# EAGLE board aspduno (EAGLE 9.4.2)
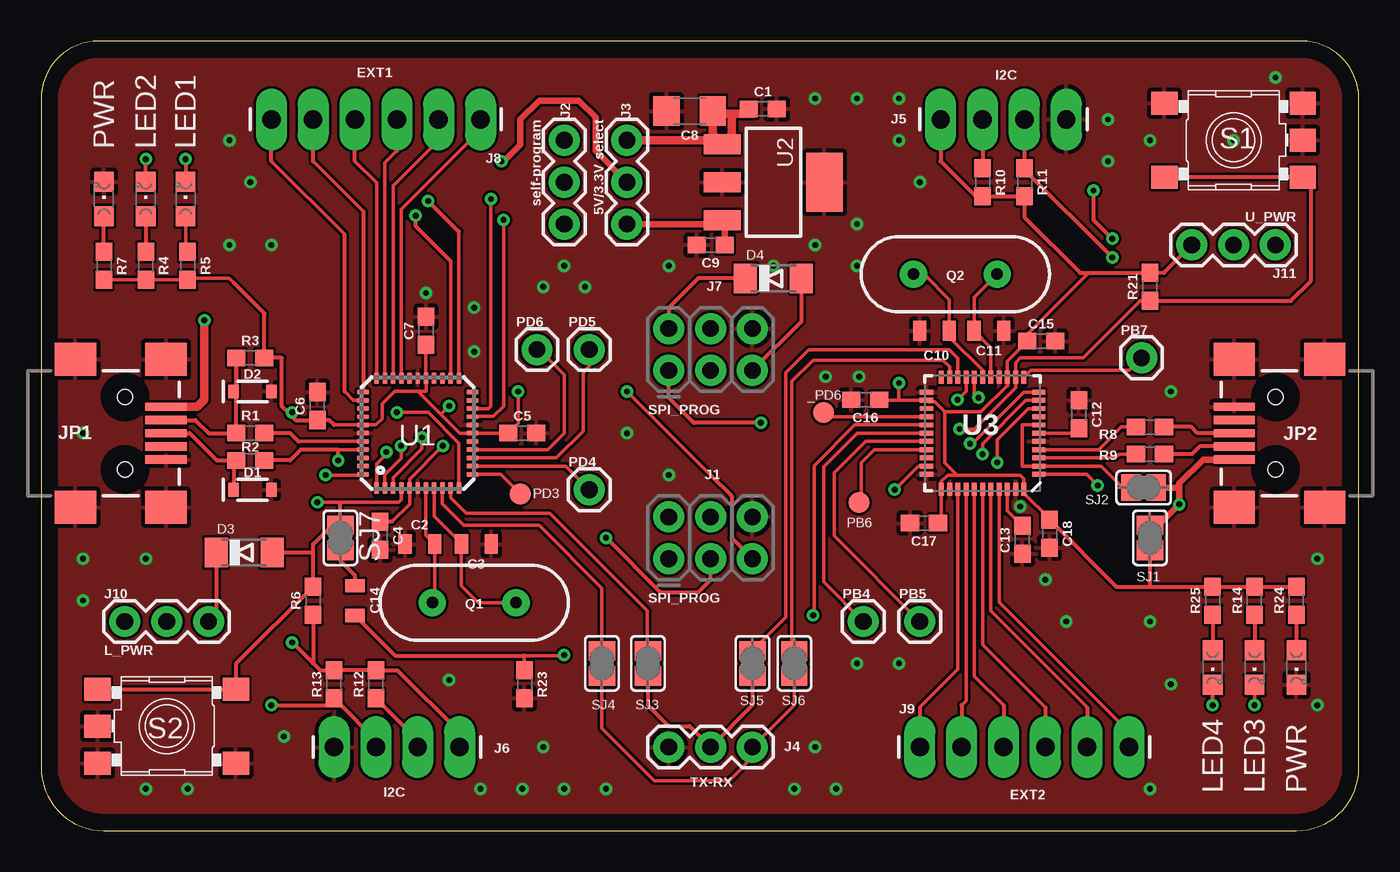
[diagram p0: board, top side]
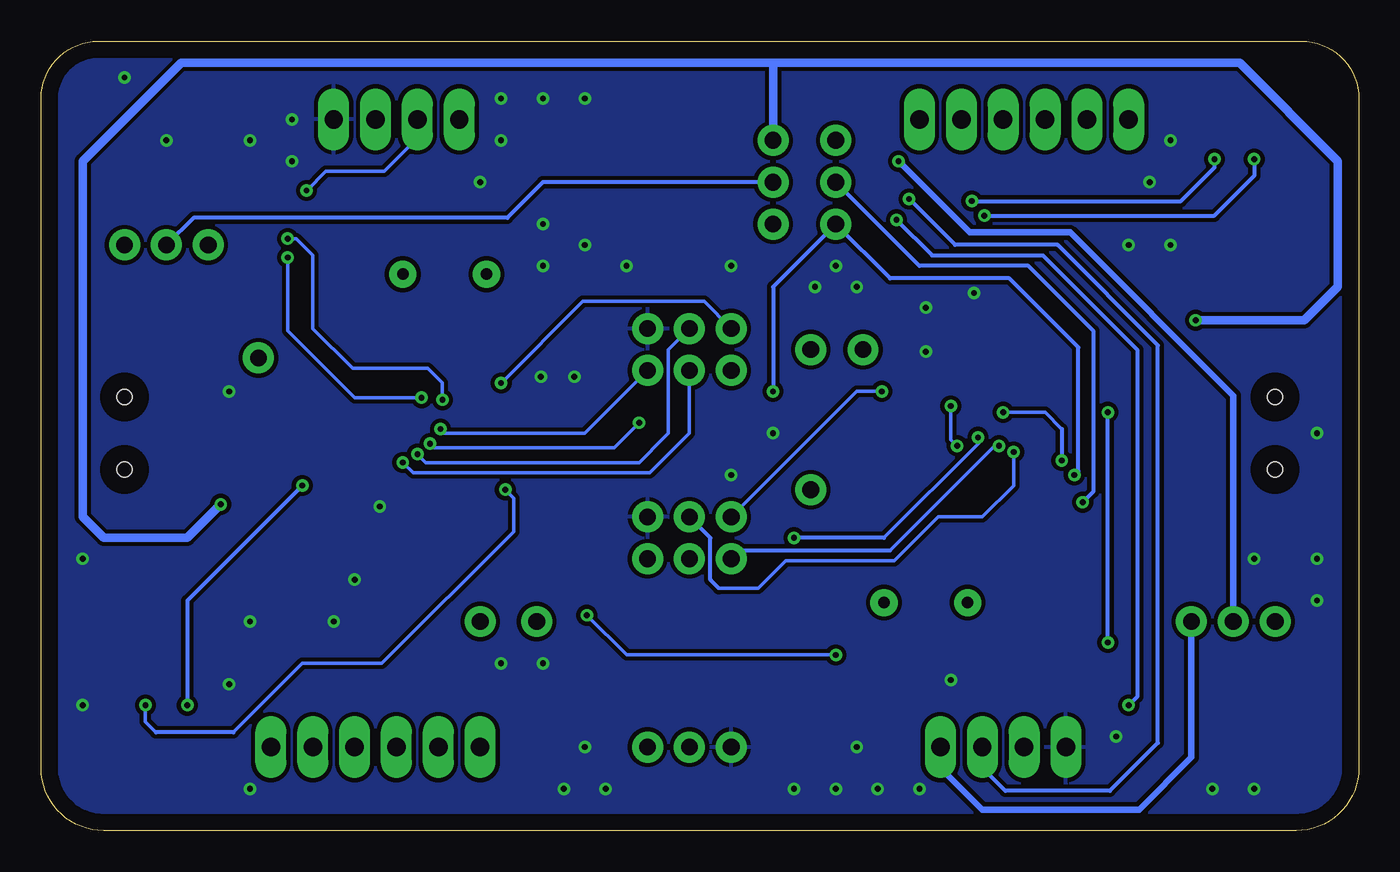
[diagram p1: board, bottom side, seen from below]

Size 79.99 x 47.93 mm. Coordinates in mm from the lower left corner, seen from the top.
Outline: 0,44.45 0,3.81 arc90 3.81,0 76.2,0 arc90 79.99,3.79 79.99,44.47 arc90 76.53,47.93 3.48,47.93 arc90 0,44.45
Copper layers (1*16): Top 0.035mm / dielectric 1.5mm / Bottom 0.035mm
Design rules "default": minimum track width 6mil, minimum drill 0.35mm, track to track 6mil, track to pad 6mil, pad to pad 6mil, via to via 6mil, smd to smd 6mil, copper to edge 40mil, drill to drill 6mil, minimum pad ring 10mil, minimum via ring 8mil, stop-mask expansion 4mil, vias tented up to drill 0mil, thermal gap 10mil

## Footprints (pad centres in the part's own frame; a part is rotated, then mirrored left to right if it is on the bottom)
B1,27 = smd 1.27 x 1.27: TP 0,0
0603 = smd 1.1 x 1: 1 -0.85,0; 2 0.85,0
0805 = smd 0.8 x 1.2: 1 -0.9,0; 2 0.9,0
1206 = smd 1.6 x 1.8: 1 -1.4,0; 2 1.4,0
SOD-323 = smd 0.63 x 0.83: A 1.15,0; C -1.15,0
MINIMELF = smd 1.4 x 1.8: A 1.7,0; C -1.7,0
2X3-NS = drill 1.016 pad 1.88: 1 -2.54,-1.27; 2 -2.54,1.27; 3 0,-1.27; 4 0,1.27; 5 2.54,-1.27; 6 2.54,1.27
1X03 = drill 1.016 pad 1.88: 1 0,0; 2 2.54,0; 3 5.08,0
1X04_LONGPADS = drill 1.118 pad 1.88 long: 1 0,0; 2 2.54,0; 3 5.08,0; 4 7.62,0
1X06_LONGPADS = drill 1.118 pad 1.88 long: 1 0,0; 2 2.54,0; 3 5.08,0; 4 7.62,0; 5 10.16,0; 6 12.7,0
USB-MINIB = smd 2.5 x 0.5: D+ 2.5,0; D- 2.5,0.8; GND 2.5,-1.6; ID 2.5,-0.8; VBUS 2.5,1.6 | smd 2.5 x 2: S1 -3,4.5; S2 2.5,4.5; S3 -3,-4.5; S4 2.5,-4.5 | hole 0.9: 0,2.2; 0,-2.2
CHIPLED_0805 = smd 1.2 x 1.2: A 0,-1.05; C 0,1.05
1X01 = drill 1.016 pad 1.88: 1 0,0
HC49US = drill 0.7 pad 1.651: 1 -2.54,0; 2 2.54,0
SKHMPXE010 = smd 1.6 x 1.4: 1 -4.2,2.25; 2 4.2,2.25; 3 -4.2,-2.25; 4 4.2,-2.25; 5 4.2,0
SJ = smd 1.168 x 1.6: 1 -0.762,0; 2 0.762,0
MLF44 = smd 0.7 x 0.3: 1 -3.325,2.5; 2 -3.325,2; 3 -3.325,1.5; 4 -3.325,1; 5 -3.325,0.5; 6 -3.325,0; 7 -3.325,-0.5; 8 -3.325,-1; 9 -3.325,-1.5; 10 -3.325,-2; 11 -3.325,-2.5; 23 3.325,-2.5; 24 3.325,-2; 25 3.325,-1.5; 26 3.325,-1; 27 3.325,-0.5; 28 3.325,0; 29 3.325,0.5; 30 3.325,1; 31 3.325,1.5; 32 3.325,2; 33 3.325,2.5 | smd 0.3 x 0.7: 12 -2.5,-3.325; 13 -2,-3.325; 14 -1.5,-3.325; 15 -1,-3.325; 16 -0.5,-3.325; 17 0,-3.325; 18 0.5,-3.325; 19 1,-3.325; 20 1.5,-3.325; 21 2,-3.325; 22 2.5,-3.325; 34 2.5,3.325; 35 2,3.325; 36 1.5,3.325; 37 1,3.325; 38 0.5,3.325; 39 0,3.325; 40 -0.5,3.325; 41 -1,3.325; 42 -1.5,3.325; 43 -2,3.325; 44 -2.5,3.325
SOT-223-3 = smd 1.219 x 2.235: 1 -2.311,-3.099; 2 0,-3.099; 3 2.311,-3.099 | smd 3.6 x 2.2: 4 0,3.099
QFN-44-NOPAD = smd 0.8 x 0.3: 1 -3.4,2.5; 2 -3.4,2; 3 -3.4,1.5; 4 -3.4,1; 5 -3.4,0.5; 6 -3.4,0; 7 -3.4,-0.5; 8 -3.4,-1; 9 -3.4,-1.5; 10 -3.4,-2; 11 -3.4,-2.5; 23 3.4,-2.5; 24 3.4,-2; 25 3.4,-1.5; 26 3.4,-1; 27 3.4,-0.5; 28 3.4,0; 29 3.4,0.5; 30 3.4,1; 31 3.4,1.5; 32 3.4,2; 33 3.4,2.5 | smd 0.3 x 0.8: 12 -2.5,-3.4; 13 -2,-3.4; 14 -1.5,-3.4; 15 -1,-3.4; 16 -0.5,-3.4; 17 0,-3.4; 18 0.5,-3.4; 19 1,-3.4; 20 1.5,-3.4; 21 2,-3.4; 22 2.5,-3.4; 34 2.5,3.4; 35 2,3.4; 36 1.5,3.4; 37 1,3.4; 38 0.5,3.4; 39 0,3.4; 40 -0.5,3.4; 41 -1,3.4; 42 -1.5,3.4; 43 -2,3.4; 44 -2.5,3.4

## Placement (x,y rotation side)
_PD6  TPB1,27  [B1,27]  47.5,25.4 0 top
C1  0.1uF  [0603]  43.81,43.82 0 top
C2  22p  [0805]  22.99,17.4 0 top
C3  22p  [0805]  26.42,17.4 180 top
C4  0.1uF  [0603]  20.57,17.91 270 top
C5  0.1uF  [0603]  29.21,24.13 0 top
C6  0.1uF  [0603]  16.76,25.78 90 top
C7  0.1uF  [0603]  23.37,30.35 90 top
C8  4.7uF  [1206]  39.37,43.69 180 top
C9  0.1uF  [0603]  40.64,35.56 180 top
C10  22p  [0805]  54.23,30.35 0 top
C11  22p  [0805]  57.53,30.35 180 top
C12  1uF  [0603]  62.99,25.27 270 top
C13  0.1uF  [0603]  59.56,17.65 90 top
C14  0.1uF  [0805]  19.05,13.97 270 top
C15  0.1uF  [0603]  60.71,29.72 0 top
C16  0.1uF  [0603]  50.04,26.16 180 top
C17  0.1uF  [0603]  53.59,18.67 180 top
C18  0.1uF  [0603]  61.21,18.03 270 top
D1  3.3V  [SOD-323]  12.83,20.7 0 top
D2  3.3V  [SOD-323]  12.83,26.67 0 top
D3  CD1206-S01575  [MINIMELF]  12.32,16.89 0 top
D4  CD1206-S01575  [MINIMELF]  44.45,33.53 0 top
J1  SPI_PROG  [2X3-NS]  40.64,17.78 0 top
J2  self-program  [1X03]  31.75,41.91 270 top
J3  5V/3.3V select  [1X03]  35.56,41.91 270 top
J4  TX-RX  [1X03]  38.1,5.08 0 top
J5  I2C  [1X04_LONGPADS]  54.61,43.18 0 top
J6  I2C  [1X04_LONGPADS]  25.4,5.08 180 top
J7  SPI_PROG  [2X3-NS]  40.64,29.21 0 top
J8  EXT1  [1X06_LONGPADS]  26.67,43.18 180 top
J9  EXT2  [1X06_LONGPADS]  53.34,5.08 0 top
J10  L_PWR  [1X03]  5.08,12.7 0 top
J11  U_PWR  [1X03]  74.93,35.56 180 top
JP1  USB_MINI-B_SMT  [USB-MINIB]  5.08,24.13 0 top
JP2  USB_MINI-B_SMT  [USB-MINIB]  74.93,24.13 180 top
LED1  green  [CHIPLED_0805]  8.76,38.35 0 top
LED2  red  [CHIPLED_0805]  6.35,38.35 0 top
LED3  green  [CHIPLED_0805]  73.66,9.91 180 top
LED4  green  [CHIPLED_0805]  71.12,9.91 180 top
LED5  PWR  [CHIPLED_0805]  76.2,9.91 180 top
PB4  [1X01]  49.91,12.7 0 top
PB5  [1X01]  53.34,12.7 0 top
PB6  TPB1,27  [B1,27]  49.66,19.94 0 top
PB7  [1X01]  66.8,28.7 0 top
PD3  TPB1,27  [B1,27]  29.08,20.45 0 top
PD4  [1X01]  33.27,20.7 0 top
PD5  [1X01]  33.27,29.21 0 top
PD6  [1X01]  30.1,29.21 0 top
PWR  PWR  [CHIPLED_0805]  3.81,38.35 0 top
Q1  12Mhz  [HC49US]  26.29,13.84 180 top
Q2  16Mhz  [HC49US]  55.5,33.78 180 top
R1  68  [0603]  12.7,24.13 180 top
R2  68  [0603]  12.7,22.48 180 top
R3  2.2k  [0603]  12.7,28.7 0 top
R4  2K  [0603]  6.35,34.29 270 top
R5  2K  [0603]  8.89,34.29 270 top
R6  10K  [0603]  16.51,13.97 90 top
R7  2K  [0603]  3.81,34.29 270 top
R8  68  [0603]  67.31,24.51 180 top
R9  68  [0603]  67.31,22.86 180 top
R10  4K7  [0603]  57.15,39.37 270 top
R11  4K7  [0603]  59.69,39.37 270 top
R12  4K7  [0603]  20.32,8.89 90 top
R13  4K7  [0603]  17.78,8.89 90 top
R14  2K  [0603]  73.66,13.97 90 top
R21  10K  [0603]  67.31,33.02 90 top
R23  1K  [0603]  29.34,8.89 270 top
R24  2K  [0603]  76.2,13.97 90 top
R25  2K  [0603]  71.12,13.97 90 top
S1  SKHMPSE010  [SKHMPXE010]  72.39,41.91 0 top
S2  SKHMPSE010  [SKHMPXE010]  7.62,6.35 180 top
SJ1  [SJ]  67.31,17.78 90 top
SJ2  [SJ]  66.93,20.83 0 top
SJ3  [SJ]  36.83,10.16 270 top
SJ4  [SJ]  34.04,10.16 270 top
SJ5  [SJ]  43.18,10.16 270 top
SJ6  [SJ]  45.72,10.16 270 top
SJ7  [SJ]  18.16,17.78 270 top
U1  M32L  [MLF44]  22.86,24.13 90 top
U2  TC1262_VDB  [SOT-223-3]  44.45,39.37 270 top
U3  32U4  [QFN-44-NOPAD]  57.15,24.13 180 top

## Library data of the parts
_PD6 PB6 PD3 = testpad
C1 C4-C7 C9 C12 C13 C15-C18 = SparkFun-Capacitors; PROD_ID: CAP-08604
C2 C3 C10 C11 C14 = SparkFun-Capacitors; PROD_ID: CAP-08469
C8 = SparkFun-Capacitors; PROD_ID: CAP-10300
D1 D2 = SparkFun-DiscreteSemi; PROD_ID: DIO-11284
D3 D4 = diode
J1-J4 J7-J11 PB4 PB5 PB7 PD4-PD6 = SparkFun-Connectors
J5 J6 = SparkFun-Connectors; PROD_ID: CONN-09696
JP1 JP2 = SparkFun-Connectors; PROD_ID: CONN-08193; SF_ID: PRT-00587
LED1-LED5 PWR = led
Q1 Q2 = SparkFun-Clocks
R1-R14 R21 R23-R25 = SparkFun-Resistors; PROD_ID: RES-08272
S1 S2 = switch
SJ1-SJ7 = jumper
U1 = atmel; MPN: ATMEGA32-16MU; OC_FARNELL: 1455108; OC_NEWARK: 58M3733
U2 = bt_regulator
U3 = SparkFun-IC-Microcontroller; PROD_ID: IC-10828

## Nets
3.3V: C9.1 J3.3 U2.3
5V: C1.1 C8.1 J3.1 JP1.VBUS JP2.VBUS SJ1.2 SJ2.1 SJ2.2 U2.1 U3.2 U3.7
DTR: C14.2 R23.1 U3.27
GND: C1.2 C2.1 C3.1 C4.2 C5.2 C6.2 C7.2 C8.2 C9.2 C10.1 C11.1 C12.1 C13.1 C15.2 C16.2 C17.2 C18.2 D1.A D2.A J1.6 J4.1 J5.4 J6.4 J7.6 JP1.GND JP1.S1 JP1.S2 JP1.S3 JP1.S4 JP2.GND JP2.S1 JP2.S2 JP2.S3 JP2.S4 LED5.C PWR.C R23.2 S1.1 S1.2 S1.5 S2.1 S2.2 S2.5 U1.6 U1.18 U1.28 U1.39 U2.2 U2.4 U3.5 U3.15 U3.23 U3.33 U3.35 U3.43
MISO: J1.1 U1.2
MOSI: J1.4 U1.1
N$1: LED1.C U1.23
N$2: C14.1 SJ7.2
N$3: J8.1 U1.30
N$4: J8.2 U1.31
N$5: D2.C JP1.D- R1.2 R3.1
N$6: J8.3 U1.32
N$7: R2.1 U1.11 U1.41
N$8: D1.C JP1.D+ R2.2
N$9: D3.A J2.2 R6.2 S2.3 S2.4 SJ7.1 U1.4
N$10: JP2.D+ R8.1
N$11: PWR.A R7.1
N$12: R8.2 U3.4
N$13: LED2.A R4.1
N$14: LED2.C U1.24
N$15: R9.2 U3.3
N$16: R1.1 U1.40
N$17: JP2.D- R9.1
N$18: C10.2 Q2.2 U3.17
N$19: C11.2 Q2.1 U3.16
N$20: C13.2 U3.42
N$21: C12.2 U3.6
N$22: C2.2 Q1.2 U1.7
N$23: C3.2 Q1.1 U1.8
N$24: J5.3 R11.1 U3.18
N$25: LED1.A R5.1
N$26: J6.3 R13.1 U1.19
N$27: J5.2 R10.1 U3.19
N$29: J7.1 U3.11
N$30: J7.4 U3.10
N$31: LED3.A R14.1
N$32: LED3.C U3.32
N$33: J7.3 U3.9
N$34: PB7.1 U3.12
N$35: PD4.1 U1.13
N$36: PB6.TP U3.30
N$37: J6.2 R12.1 U1.20
N$38: SJ4.1 U1.9
N$39: SJ6.1 U3.21
N$40: D4.A J7.5 R21.1 S1.3 S1.4 U3.13
N$41: J8.4 U1.33
N$42: J8.5 U1.34
N$43: J8.6 U1.35
N$46: J9.1 U3.36
N$47: J9.2 U3.37
N$48: J9.3 U3.38
N$49: J9.4 U3.39
N$50: J9.5 U3.40
N$51: J9.6 U3.41
N$53: SJ5.1 U3.20
N$54: SJ3.1 U1.10
N$61: PD6.1 U1.15
N$62: PD5.1 U1.14
N$64: PD3.TP U1.12
N$68: _PD6.TP U3.26
N$69: LED4.C U3.1
N$71: PB4.1 U3.28
N$72: PB5.1 U3.29
N$73: LED5.A R24.1
N$74: LED4.A R25.1
RST: J1.5 J2.3 U1.44
RT0: J4.2 SJ3.2 SJ5.2
RT1: J4.3 SJ4.2 SJ6.2
SCK: J1.3 U1.3
VCC: J3.2 J10.2 J11.2
VDD: C4.1 C5.1 C6.1 C7.1 D3.C J1.2 J6.1 J10.3 R3.2 R4.2 R5.2 R6.1 R7.2 R12.2 R13.2 U1.5 U1.17 U1.27 U1.38
VEE: C15.1 C16.1 C17.1 C18.1 D4.C J5.1 J7.2 J11.3 R10.2 R11.2 R14.2 R21.2 R24.2 R25.2 SJ1.1 U3.14 U3.24 U3.34 U3.44

## Tracks (layer width: path | path; a pad name or v marks a point on that pad's centre or on a via)
3.3V
  Top 0.406: J3.3 41.12,36.83 U2.3 41.49,36.92 C9.1
5V  (via drill 0.35)
  Top 0.203: U3.7 59.56,24.63 59.56,22.13 U3.2 64.36,22.13 65.66,20.83 SJ2.1 SJ2.2
  Top 0.406: JP2.VBUS 70.54,22.53 69.09,21.08 69.09,20.83 | 41.12,41.91 U2.1 | 69.09,20.83 v69.09,19.81 67.82,18.54 SJ1.2 | SJ2.2 69.09,20.83
  Top 0.508: JP1.VBUS 9.47,25.73 9.91,26.16 v9.91,30.99 | J3.1 41.12,41.91 | C1.1 43.24,43.51 41.91,43.51 | 40.77,43.18 40.77,42.26 U2.1 41.91,42.24 41.91,43.51 | 40.77,43.18 C8.1 | 40.77,43.18 41.1,43.51 41.91,43.51
  Bottom 0.508: v9.91,30.99 3.3,30.99 1.27,33.02 1.27,40.64 7.24,46.61 35.56,46.61 | 35.56,46.61 J3.1 | 35.56,46.61 71.5,46.61 77.47,40.64 77.47,19.05 76.2,17.78 71.12,17.78 v69.09,19.81
DTR  (via drill 0.35)
  Top 0.203: U3.27 49.4,24.63 46.93,22.16 46.93,13.14 v46.86,13.08 | R23.1 29.34,10.63 31.71,10.63 v31.75,10.67
  Top 0.254: C14.2 21.49,10.63 29.34,10.63
  Bottom 0.203: v31.75,10.67 44.45,10.67 v46.86,13.08
GND  (via drill 0.35)
  other vias: 26.29,31.75 26.29,29.08 49.66,27.56 47.62,27.56 59.44,19.69 72.39,41.91 67.31,12.7 60.96,15.24 46.99,5.08 30.48,5.08 24.77,9.14 23.37,32.64 13.97,35.56 11.43,35.56 6.35,16.51 2.54,16.51 2.54,13.97 6.35,2.54 8.89,2.54 26.67,2.54 29.21,2.54 31.75,2.54 34.29,2.54 14.73,5.71 45.72,2.54 48.26,2.54 49.53,10.16 52.07,10.16 67.31,2.54 77.47,7.62 68.58,8.89 62.23,12.7 2.54,24.13 11.43,41.91 12.7,39.37 38.1,34.29 44.45,34.29 46.99,35.56 49.53,36.83 49.53,34.29 46.99,44.45 52.07,44.45 52.07,41.91 49.53,44.45 53.34,39.37 74.93,45.72 64.77,43.18 64.77,40.64 67.31,41.91 68.58,26.67 77.47,16.51 35.56,24.13 38.1,21.59 31.75,34.29 30.48,33.02 33.02,33.02
  pour Top: -1.27,0 80.01,0 80.01,48.26 -1.27,48.26
  pour Bottom (isolate 0.254): 0,50.8 0,-1.27 80.01,-1.27 80.01,50.8
MISO  (via drill 0.35)
  Top 0.203: U1.2 20.86,21.62 21.84,22.61 v21.84,23.37
  Bottom 0.203: 22.1,23.37 28.45,17.02
  Bottom 0.254: v21.84,23.37 22.1,23.37 | J1.1 37.59,17.02 28.45,17.02
MOSI  (via drill 0.35)
  Top 0.203: U1.1 20.36,22.27 20.96,22.86
  Top 0.254: 20.96,22.86 v20.96,22.99
  Bottom 0.203: v20.96,22.99 20.96,20.95 22.86,19.05 25.53,19.05 28.19,16.38 34.8,16.38 36.45,14.73 38.86,14.73
  Bottom 0.254: 38.86,14.73 39.37,15.24 39.37,17.78 J1.4
N$1  (via drill 0.35)
  Top 0.203: U1.23 25.36,36.36
  Top 0.254: 25.36,36.36 v23.5,38.23 | v8.76,40.77 LED1.C
  Bottom 0.254: v23.5,38.23 10.8,38.23 8.76,40.26 v8.76,40.77
N$2
  Top 0.254: SJ7.2 18.16,16.38 19.05,15.49 C14.1
N$3
  Top 0.203: U1.30 21.86,37.73 26.67,42.54
  Top 0.254: 26.67,42.54 J8.1
N$4
  Top 0.203: U1.31 21.36,39.14 24.13,41.91
  Top 0.254: 24.13,41.91 J8.2
N$5
  Top 0.254: JP1.D- 9.36,24.93 10.16,24.13 R1.2 R3.1 11.85,26.84 D2.C
N$6
  Top 0.203: U1.32 20.86,40.54 21.59,41.27
  Top 0.254: 21.59,41.27 J8.3
N$7  (via drill 0.35)
  Top 0.203: U1.41 18.03,23.13 | U1.11 25.36,23.54 23.5,25.4 v21.59,25.4
  Top 0.254: R2.1 15.11,22.48 15.76,23.13 18.03,23.13 v18.03,22.48
  Bottom 0.203: v21.59,25.4 19.05,25.4 18.03,24.38
  Bottom 0.254: 18.03,24.38 v18.03,22.48
N$8
  Top 0.254: D1.C 11.68,22.31 R2.2 10.67,22.48 9.02,24.13 JP1.D+
N$9  (via drill 0.35)
  Top 0.203: U1.4 21.86,20.08 21.72,19.94 18.16,19.94 v16.76,19.94
  Top 0.254: S2.4 S2.3 11.82,10.13 R6.2 16.51,16.89 | 16.51,16.89 16.51,17.4 17.78,18.67 18.16,18.67 | SJ7.1 18.16,18.67 | 18.16,18.67 18.16,19.94 | D3.A 16.51,16.89
  Bottom 0.254: v16.76,19.94 16.13,20.57 16.13,30.35 20.07,34.29 26.67,34.29 J2.2
N$10
  Top 0.254: R8.1 69.81,24.51 70.19,24.13 JP2.D+
N$11
  Top 0.254: R7.1 PWR.A
N$12
  Top 0.203: U3.4 64.19,23.13 65.57,24.51 R8.2
N$13
  Top 0.254: LED2.A R4.1
N$14  (via drill 0.35)
  Top 0.203: U1.24 24.86,34.58
  Top 0.254: v22.73,37.34 22.73,36.7 24.86,34.58 | LED2.C v6.35,40.77
  Bottom 0.254: v22.73,37.34 8.76,37.34 6.35,39.75 v6.35,40.77
N$15
  Top 0.203: R9.2 65.44,22.86 65.21,22.63 U3.3
N$16
  Top 0.203: U1.40 15.61,23.63
  Top 0.254: 15.61,23.63 15.11,24.13 R1.1
N$17
  Top 0.254: JP2.D- 70.32,23.33 69.85,22.86 R9.1
N$18
  Top 0.203: U3.17 57.18,27.56 57.18,27.91 55.13,29.96 C10.2 55.13,32.25 53.59,33.78 Q2.2
N$19
  Top 0.203: U3.16 57.65,29.33 C11.2 56.63,32.37 58.1,33.84
  Top 0.254: Q2.1 58.1,33.84
N$20
  Top 0.203: U3.42 58.65,19.42 C13.2
N$21
  Top 0.203: U3.6 62.99,24.13
  Top 0.254: C12.2 62.99,24.13
N$22
  Top 0.203: U1.7 23.36,17.93 C2.2 23.89,13.98 Q1.2
N$23
  Top 0.203: C3.2 23.86,19.08 U1.8 | C3.2 25.52,14.87 26.54,13.84 Q1.1
  Top 0.254: C3.2
N$24  (via drill 0.35)
  Top 0.203: U3.18 56.65,26.54 v56.9,26.29
  Top 0.254: J5.3 R11.1 59.69,40.13 v65.02,34.8
  Bottom 0.203: v65.02,34.8 65.02,30.35 60.96,26.29 v56.9,26.29
N$25
  Top 0.203: LED1.A 8.76,35.69 8.89,35.56
  Top 0.254: 8.89,35.56 R5.1
N$26  (via drill 0.35)
  Top 0.203: v28.07,37.08 28.07,25.78 27.43,25.15 26.2,25.15 | 17.78,7.62 17.99,7.83
  Top 0.254: R13.1 17.99,7.83 20.32,5.5 J6.3 | U1.19 26.2,25.15 | v13.97,7.62 17.78,7.62
  Bottom 0.254: v28.07,37.08 25.91,34.93 19.18,34.93 13.46,29.21 13.46,8.13 v13.97,7.62
N$27  (via drill 0.35)
  Top 0.203: U3.19 56.15,26.69 v55.63,26.16
  Top 0.254: J5.2 R10.1 | v63.88,38.86 63.88,37.08 v65.02,35.94
  Bottom 0.203: v55.63,26.16 55.65,26.19 55.65,27.2 56.52,28.07 61.09,28.07 63.5,30.48 63.5,34.93 64.51,35.94 v65.02,35.94 | v63.88,38.86 62.71,40.03 59.16,40.03 57.15,42.04 J5.2
N$29  (via drill 0.35)
  Top 0.203: U3.11 59.65,26.63 56.52,23.5 v56.39,23.5
  Top 0.254: v43.69,24.77 39.62,24.77 38.1,26.29 J7.1
  Bottom 0.203: v56.39,23.5 56.13,23.24 45.21,23.24 v43.69,24.77
N$30  (via drill 0.35)
  Top 0.203: U3.10 59.79,26.13 57.15,23.5 v57.15,22.86
  Bottom 0.203: J7.4 41.91,29.21 41.91,24.13 42.16,23.88 43.69,22.35 56.64,22.35 v57.15,22.86
N$31
  Top 0.254: R14.1 LED3.A
N$32  (via drill 0.35)
  Top 0.203: v51.82,20.7 53.24,22.13 U3.32 | v73.66,7.62 LED3.C
  Bottom 0.203: v51.82,20.7 51.31,20.19 51.31,18.16 59.31,10.16 64.13,10.16 68.33,5.97 | 73.02,5.97 73.66,6.6 v73.66,7.62
  Bottom 0.254: 68.33,5.97 73.02,5.97
N$33  (via drill 0.35)
  Top 0.203: U3.9 59.92,25.63 58.04,23.75 v58.04,22.35
  Bottom 0.203: J7.3 40.64,24.13 41.91,22.86 43.05,21.72 57.4,21.72 v58.04,22.35
N$34
  Top 0.203: U3.12 59.88,27.76 60.06,27.94 66.04,27.94 PB7.1
N$35
  Top 0.203: U1.13 31.84,22.13 PD4.1
N$36
  Top 0.203: U3.30 50.56,23.13 49.78,22.35 49.78,20.07 PB6.TP
N$37  (via drill 0.35)
  Top 0.203: v27.3,38.35 27.3,25.78 27.15,25.63 U1.20
  Top 0.254: R12.1 22.86,5.5 J6.2
  Bottom 0.254: J6.2 22.86,3.81 21.46,2.41 15.11,2.41 12.19,5.33 12.19,29.46 18.29,35.56 24.51,35.56 v27.3,38.35
N$38
  Top 0.203: U1.9 24.36,19.84 25.65,18.54 30.23,18.54 34.04,14.73 SJ4.1
N$39
  Top 0.203: U3.21 55.15,28.16 54.74,28.58 46.86,28.58 45.57,27.28 45.57,11.07 SJ6.1
N$40  (via drill 0.35)
  Top 0.203: 66.71,32.17 63.25,28.7 59.44,28.7 59.15,28.42 U3.13 59.15,26.89 56.64,24.38 v55.75,24.38 | 68.21,39.66 S1.3 | 77.09,39.16 S1.4
  Top 0.254: 66.71,32.17 R21.1 75.86,32.17 77.09,33.4 77.09,39.16 | S1.3 | S1.4 68.21,39.66 | D4.A 46.15,30.91 J7.5
  Bottom 0.203: v55.75,24.38 55.5,24.13 46.99,24.13 J7.5
N$41
  Top 0.203: U1.33 20.36,39.33 19.05,40.64
  Top 0.254: 19.05,40.64 J8.4
N$42
  Top 0.203: 19.56,37.59 16.51,40.64
  Top 0.254: 16.51,40.64 J8.5 | 19.56,37.59 19.56,26.65 U1.34
N$43
  Top 0.203: U1.35 18.96,26.13 18.41,26.67 | 18.41,36.2 13.97,40.64
  Top 0.254: 13.97,40.64 J8.6 | 18.41,26.67 18.41,36.2
N$46
  Top 0.203: U3.36 55.65,9.8 53.34,7.49
  Top 0.254: 53.34,7.49 J9.1
N$47
  Top 0.203: U3.37 56.15,7.89 55.88,7.62
  Top 0.254: 55.88,7.62 J9.2
N$48
  Top 0.203: U3.38 56.65,9.39 58.42,7.62
  Top 0.254: 58.42,7.62 J9.3
N$49
  Top 0.203: U3.39 57.15,11.3 60.96,7.49
  Top 0.254: 60.96,7.49 J9.4
N$50
  Top 0.203: U3.40 57.65,13.34 63.5,7.49
  Top 0.254: 63.5,7.49 J9.5
N$51
  Top 0.203: U3.41 58.15,13.86 66.04,5.97
  Top 0.254: 66.04,5.97 J9.6
N$53
  Top 0.203: U3.20 55.65,28.68 55.12,29.21 46.61,29.21 45.21,27.81 45.21,12.95 SJ5.1
N$54
  Top 0.203: U1.10 24.86,20.23 25.81,19.28 30.88,19.28 36.8,13.36 36.8,10.95 SJ3.1
N$61
  Top 0.203: U1.15 30.75,23.13 31.75,24.13 31.75,27.69 30.23,29.21 PD6.1
N$62
  Top 0.203: U1.14 31.27,22.63 32.89,24.26 32.89,27.81 33.27,28.19 PD5.1
N$64
  Top 0.203: U1.12 27.9,21.63 PD3.TP
N$68
  Top 0.203: U3.26 47.77,25.13 _PD6.TP
N$69  (via drill 0.35)
  Top 0.203: U3.1 63.46,21.63 v64.13,20.95
  Top 0.254: v71.12,7.62 LED4.C
  Bottom 0.254: v64.13,20.95 71.12,13.97 v71.12,7.62
N$71
  Top 0.203: PB4.1 47.5,15.11 47.5,22.1 49.53,24.13 U3.28
N$72
  Top 0.203: U3.29 50.05,23.63 48.13,21.72 48.13,17.91 PB5.1
N$73
  Top 0.254: R24.1 LED5.A
N$74
  Top 0.254: R25.1 LED4.A
RST  (via drill 0.35)
  Top 0.203: 19.5,21.59 v17.27,21.59 | 40.64,21.59 v35.56,26.67
  Top 0.254: U1.44 19.5,21.59 | 40.64,21.59 41.91,20.32 41.91,17.78 J1.5
  Bottom 0.254: v17.27,21.59 17.02,21.84 17.02,29.34 21.21,33.53 28.45,33.53 J2.3 35.56,33.02 v35.56,26.67
RT0
  Top 0.254: SJ5.2 43.18,7.62 J4.2 39.37,6.35 38.1,6.35 36.83,7.62 SJ3.2
RT1
  Top 0.203: SJ4.2 34.04,6.22 37.21,3.05 41.78,3.05 43.18,4.45 J4.3 45.72,7.62 SJ6.2
SCK  (via drill 0.35)
  Top 0.203: U1.3 21.36,21.44 23.11,23.19 v23.11,23.88
  Top 0.254: v34.29,17.78 37.59,14.48 39.88,14.48 40.64,15.24 J1.3
  Bottom 0.203: 28.83,17.78 23.11,23.5
  Bottom 0.254: v23.11,23.88 23.11,23.5 | 28.83,17.78 v34.29,17.78
VCC  (via drill 0.35)
  Top 0.406: v27.94,40.64 28.07,40.64 29.08,41.66 29.08,43.18 30.23,44.32 32.64,44.32 33.66,43.31 33.66,41.27 J3.2
  Bottom 0.254: J3.2 49.53,39.37 51.69,37.21 70.74,37.21 J11.2
  Bottom 0.406: v27.94,40.64 23.62,36.32 17.53,36.32 7.62,26.42 J10.2
VDD  (via drill 0.35)
  Top 0.203: 21.3,18.76 22.36,19.82 U1.5 22.36,21.34 v24.38,23.37 | U1.27 C7.1 | 17.79,24.63 U1.38 20.32,24.63 20.7,25.01 20.7,25.91 21.46,26.67 22.86,26.67 | 22.86,26.67 23.37,26.67 U1.27 | 24.26,25.27 25.4,24.13 U1.17 C5.1 28.96,24.73 v28.96,26.67 | 24.26,25.27 22.86,26.67 | v24.77,25.78 24.26,25.27 | R7.2 R4.2 R5.2 8.98,33.53 11.43,33.53 11.68,33.27
  Top 0.254: 21.3,18.76 C4.1 | C7.1 | 17.79,24.63 17.49,24.93 C6.1 16.73,24.89 15.49,24.89 15.11,25.27 | 15.11,25.27 14.61,25.78 14.61,28.7 R3.2 13.55,31.41 11.68,33.27 | R6.1 16.51,10.16 | 16.51,10.16 16.93,9.74 R13.2 R12.2 21.63,9.74 25.4,5.97 | U1.27 | v15.24,11.43 16.51,10.16 | v15.24,25.4 15.11,25.27 | D3.C 10.62,13.16 J10.3
  Top 0.406: 25.4,5.97 J6.1
  Bottom 0.203: v24.38,23.37 24.77,23.75 v24.77,25.78 | v28.96,26.67 30.48,26.67 J1.2
  Bottom 0.254: v15.24,11.43 v15.24,25.4
  Bottom 0.406: J10.3 10.16,4.45 13.34,1.27 22.86,1.27 25.4,3.81 J6.1
VEE  (via drill 0.35)
  Top 0.203: 54.65,18.88 U3.34 54.65,21.21 55.03,21.59 55.63,21.59 | 61.21,18.92 59.65,20.49 | 52.07,26.13 U3.24 53.85,26.03 54.26,26.03 54.86,25.43 | 52.07,26.13 50.92,26.13 | U3.14 58.65,28.51 C15.1 59.86,30.14 63.59,33.87 | 52.07,26.13 v52.07,27.18 | U3.44 59.65,21.38 59.44,21.59 55.63,21.59 | 54.86,25.43 54.86,22.35 55.63,21.59 | 58.65,27.03 57.05,25.43 54.86,25.43 | R21.2 68.16,33.87
  Top 0.254: 54.65,18.88 C17.1 | U3.44 59.65,20.49 | 61.21,18.92 C18.1 65.28,14.82 67.31,14.82 | 50.92,26.13 C16.1 | R21.2 63.59,33.87 63.07,33.87 59.69,37.25 R11.2 R10.2 56.73,38.52 54.61,40.64 J5.1 | R24.2 R14.2 R25.2 67.31,14.82 | U3.14 58.65,27.03 | 68.16,33.87 J11.3 | SJ1.1 67.31,14.82 | D4.C 39.88,33.53 38.1,31.75 J7.2
  Bottom 0.203: v52.07,27.18 47.12,32.13 39.75,32.13 J7.2